# Altium PCB EASYIOTPICO.PcbDoc
Units mm, origin at the board's own origin, x right, y up, seen from the top; angles counter-clockwise.
Board outline 37.59 x 39.24 mm, 2 copper layers (Top Layer, Bottom Layer); 43 components, 31 nets, 141 pads, 61 vias.
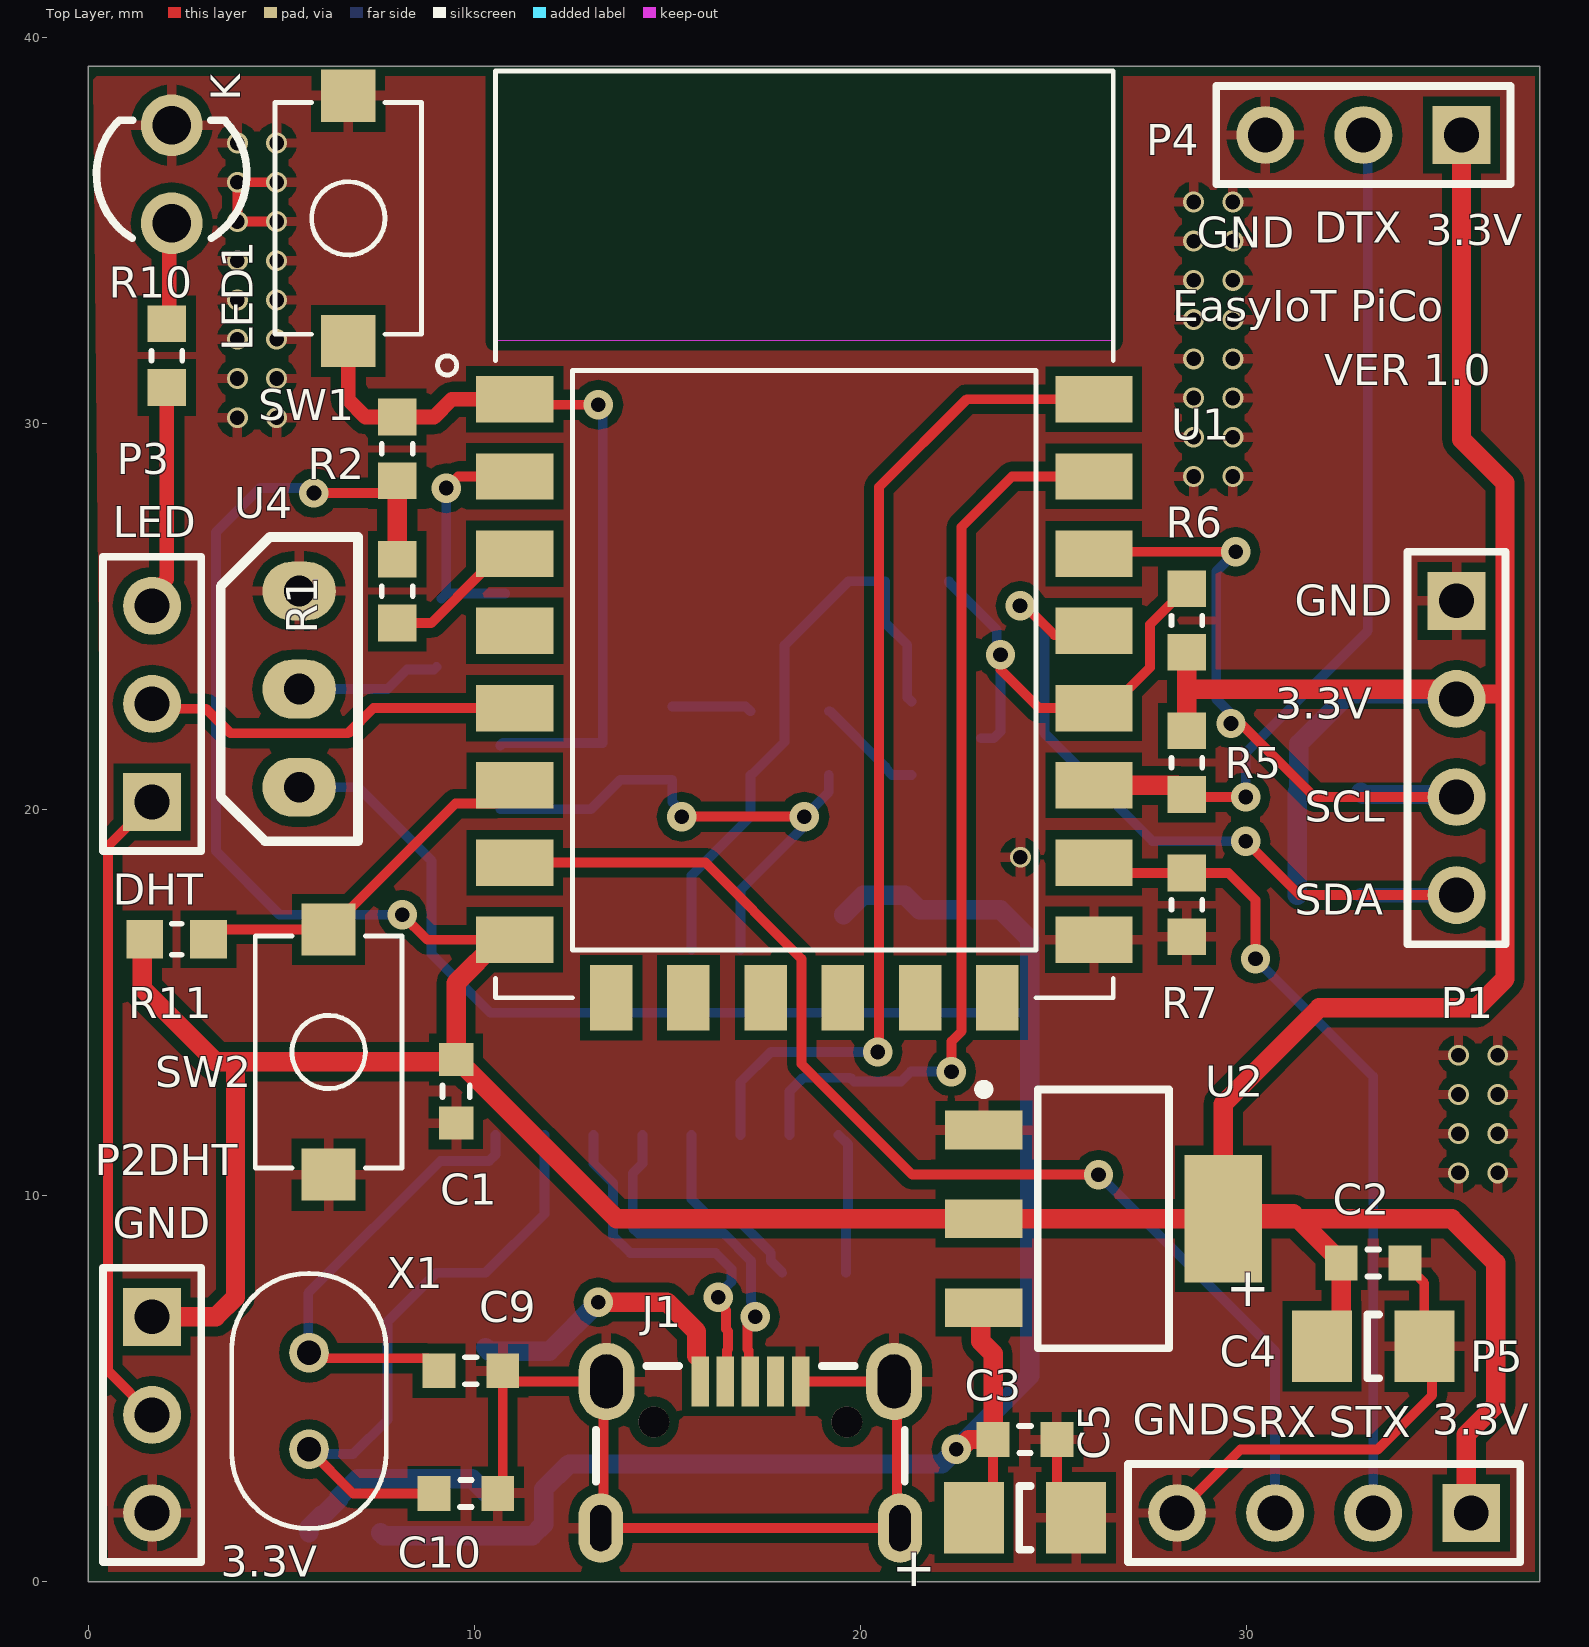
[diagram p0: Top Layer view]
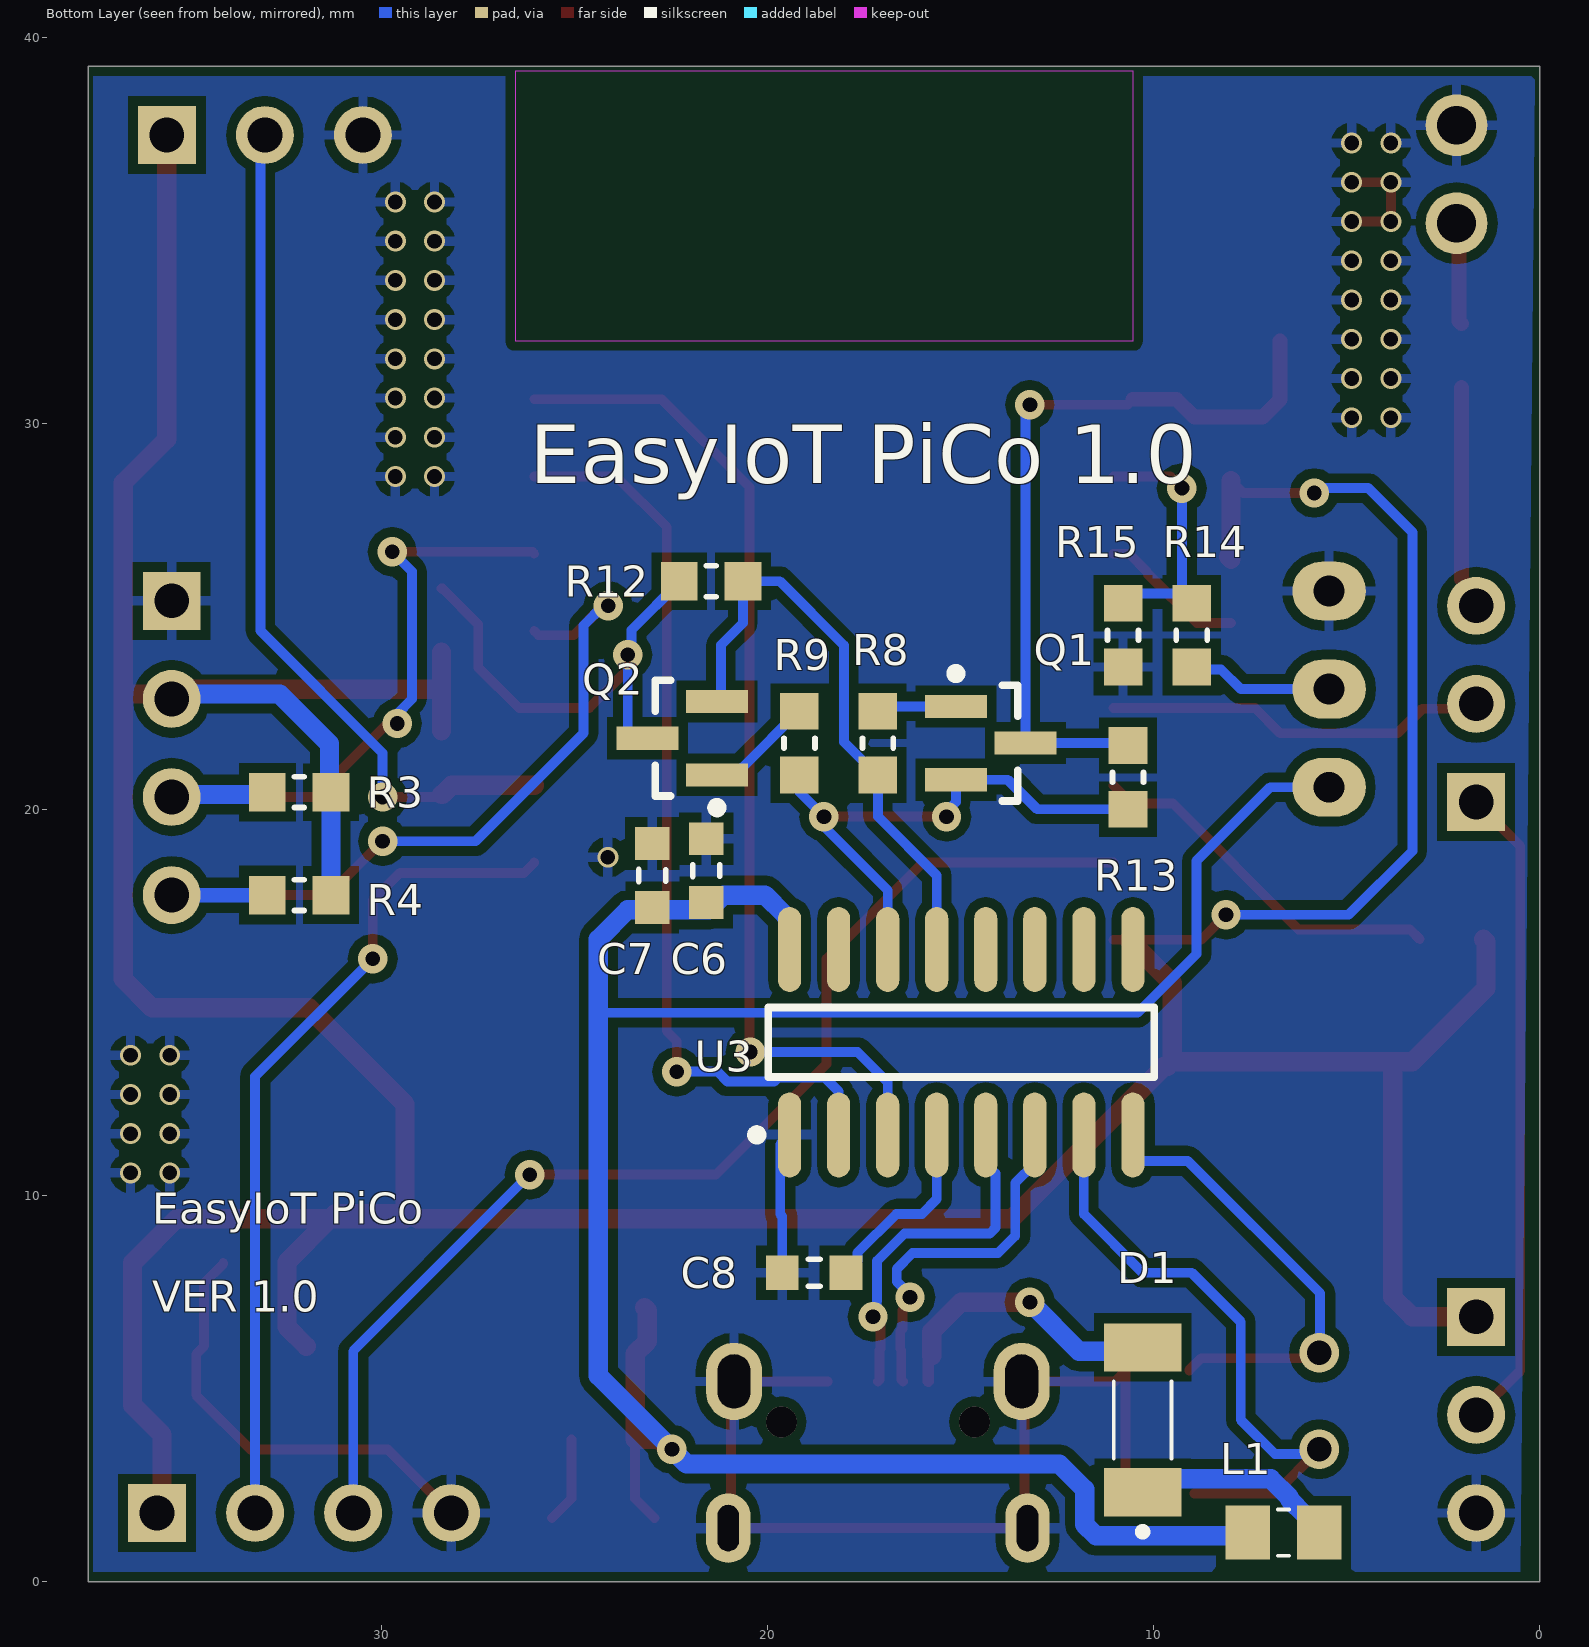
[diagram p1: Bottom Layer view, seen from below]

## Layer stack, top to bottom
Top Solder: solder mask 0.0102, Solder Resist, Dk 3.5
Top Layer: signal copper 0.0356
Dielectric 1: dielectric 0.32, FR-4, Dk 4.8
Bottom Layer: signal copper 0.0356
Bottom Solder: solder mask 0.0102, Solder Resist, Dk 3.5

## Board outline
0,0 37.592,0 37.592,39.243 0,39.243

## Design rules (kind name [scope] priority, off if disabled: settings)
Clearance [All] p1: gap=0.254 ignorepadtopadclearanceinfootprint=FALSE except(0: Arc-Hole Track-Hole SMDPad-Hole THPad-Hole Via-Hole Fill-Hole Poly-Hole Region-Hole Text-Hole; 0.2: SMDPad-SMDPad)
DiffPairsRouting [All] p1: maxlimit=0.254 minlimit=0.254 mostfreqgap=0.254 toplayer_minwidth=0.254 toplayer_maxwidth=0.381 toplayer_prefwidth=0.254 bottomlayer_minwidth=0.254 bottomlayer_maxwidth=0.381 bottomlayer_prefwidth=0.254 maxuncoupledlength=12.7
MinimumSolderMaskSliver [All] p1: minsoldermaskwidth=0.1
PolygonConnect [All] p1: connectstyle=Relief reliefconductorwidth=0.254 reliefentries=4 polygonreliefangle="90 Angle" airgapwidth=0.254
RoutingVias [All] p1: holewidth=0.381 width=0.761 viastyle="Through Hole" minholewidth=0.2 minwidth=0.5 maxholewidth=0.711 maxwidth=1.27
SilkToSolderMaskClearance [IsPad] p1: minsilkscreentomaskgap=-0.1 clearancetoexposedcopper=TRUE
SolderMaskExpansion [All] p1: expansion=0.102 istentingtop=FALSE
Width [All] p1: maxlimit=1 minlimit=0.254 preferedwidth=0.254
27 further rules are at their usual default settings.

## Classes and differential pairs
component class PROGAMMER: C6 C7 C8 C9 C10 D1 J1 L1 Q1 Q2 R8 R9 R12 R13 U3 X1
component class "POWER SUPPLY": C2 C3 C4 C5 U2
component class PERIHERALS: LED1 P1 P2DHT P3 P4 P5 R10 R11 SW2 U4
component class CONTROLLER: C1 R1 R2 R3 R4 R5 R6 R7 R14 R15 SW1 U1
differential pair D: +D_P -D_N

## Components (designator, comment, footprint, x,y, rotation, side; value= is the part's Value field where it differs from the comment)
C1 "0.1uf" CAPC0603 9.525,12.699 r270 top
C2 "0.1UF" CAPC0603 33.274,8.255 r0 top
C3 "0.1UF" CAPC0603 24.257,3.683 r0 top
C4 "10UF/10V" CAPC1206_TANTALUM 33.274,6.096 r0 top
C5 "10UF/10V" CAPC1206_TANTALUM 24.257,1.651 r0 top
C6 "0.1uf" CAPC0603 21.59,18.415 r90 bottom
C7 "0.1uf" CAPC0603 22.987,18.288 r90 bottom
C8 "0.1uf" CAPC0603 18.796,8.001 r0 bottom
C9 "22PF" CAPC0603 9.906,5.461 r180 top
C10 "22PF" CAPC0603 9.779,2.286 r180 top
D1 "SS110-A" BZT55B13GS08 10.287,4.191 r90 bottom
J1 "629105150521" 629105150521 17.145,2.286 r0 top
L1 "Inductor" CAPC0805 6.64,1.27 r0 bottom value=10mH
LED1 "LED" "Type 3mm" 2.159,36.449 r90 top
P1 "Header 4" HDR1X4 35.433,25.4 r270 top
P2DHT "Header 3" HDR1X3 1.651,6.858 r270 top (schematic designator P2)
P3 "Header 3" HDR1X3 1.651,20.193 r90 top
P4 "Header 3" HDR1X3 35.56,37.465 r180 top
P5 "Header 4" HDR1X4 35.814,1.778 r180 top
Q1 "S8050" SOT23-3 14.224,21.717 r180 bottom
Q2 "S8050" SOT23-3 22.214,21.844 r0 bottom
R1 "10K" RESC0603 8.001,25.654 r90 top value="2.55 Ohm"
R2 "10K" RESC0603 8.001,29.337 r270 top value="2.55 Ohm"
R3 "4.7K" RESC0603 32.131,20.447 r180 bottom value="2.55 Ohm"
R4 "4.7K" RESC0603 32.131,17.78 r180 bottom value="2.55 Ohm"
R5 "10K" RESC0603 28.448,21.209 r90 top value="2.55 Ohm"
R6 "10K" RESC0603 28.448,24.892 r270 top value="2.55 Ohm"
R7 "10K" RESC0603 28.448,17.526 r90 top value="2.55 Ohm"
R8 "12K" RESC0603 17.145,21.717 r270 bottom
R9 "12K" RESC0603 19.177,21.717 r270 bottom
R10 "1K" RESC0603 2.032,31.75 r270 top
R11 "10K" RESC0603 2.286,16.637 r180 top value="2.55 Ohm"
R12 "0/dnp" RESC0603 21.463,25.908 r180 bottom
R13 "0/dnp" RESC0603 10.668,20.828 r270 bottom
R14 "220K" RESC0603 9.017,24.511 r270 bottom value="2.55 Ohm"
R15 "100K" RESC0603 10.795,24.511 r90 bottom value="2.55 Ohm"
SW1 "434123025816" 434123025816 6.731,35.306 r90 top
SW2 "434123025816" 434123025816 6.223,13.716 r270 top
U1 "ESP8266-12E/ESP-12E" *XCVR_ESP8266-12E/ESP-12E 18.542,23.622 r0 top
U2 "LM1117-ADJ" SOT223 26.289,9.398 r0 top
U3 "CH340G" SOIC16_N 14.986,13.97 r90 bottom
U4 "LM35" TO92S 5.461,20.574 r90 top
X1 "ECS-120-20-46X" XTAL_ECS-120-20-46X 5.715,4.679 r270 top

## Footprints (in the part's own frame and the unit in brackets; to place one, negate y for a bottom-side part, rotate by r counter-clockwise, add the part's x,y. Pads: shape width x height; smd on the part's side, far side on the other; paste and mask are expansions set on the pad)
434123025816 [mm] "6.0*3.8mm vertical type,J-Bend SMD, height 2.5mm, black actuator, 160gf, T&R"
  rect 1.35x1.4 smd: 1(-3.175,0) 2(3.175,0)
  silkscreen extent -3,-1.9 3,1.9, body extent -3.5,-1.95 3.5,1.95, height 2.5
629105150521 [mm] "Micro USB 2.0 SMT Type B Horizontal 5 Contacts High Current"
  rect 0.45x1.3 smd: 1(-1.3,2.9) 2(-0.65,2.9) 3(0,2.9) 4(0.65,2.9) 5(1.3,2.9)
  round 0.8 hole 0.8 unplated: MH1(-2.5,1.85) MH2(2.5,1.85)
  oval 1.15x1.8 hole 0.55 slot 1.2 at 90 deg: Shell(-3.875,-0.9) Shell(3.875,-0.9)
  oval 1.45x2 hole 0.85 slot 1.4 at 90 deg: Shell(-3.725,2.9) Shell(3.725,2.9)
  silkscreen extent -4,0.3 4,3.3, body extent -4,-3.3 4,3.3, height 2.75
*XCVR_ESP8266-12E/ESP-12E [mm]
  rect 2x1.2 smd: 1(-7.5,7) 2(-7.5,5) 3(-7.5,3) 4(-7.5,1) 5(-7.5,-1) 6(-7.5,-3) 7(-7.5,-5) 8(-7.5,-7) 15(7.5,-7) 16(7.5,-5) 17(7.5,-3) 18(7.5,-1) 19(7.5,1) 20(7.5,3) 21(7.5,5) 22(7.5,7)
  rect 1.1x1.7 smd: 9(-5,-8.5) 10(-3,-8.5) 11(-1,-8.5) 12(1,-8.5) 13(3,-8.5) 14(5,-8.5)
  Keep-Out Layer region: -8.009,15.5 8,15.5 8,8.51 -8.009,8.51
  Keep-Out Layer region: -8.009,15.5 8,15.5 8,8.51 -8.009,8.51
  Keep-Out Layer region: -8.009,15.5 8,15.5 8,8.51 -8.009,8.51
  Keep-Out Layer region: -8.009,15.5 8,15.5 8,8.51 -8.009,8.51
  Keep-Out Layer region: -8.009,15.5 8,15.5 8,8.51 -8.009,8.51
  Keep-Out Layer region: -8.009,15.5 8,15.5 8,8.51 -8.009,8.51
  silkscreen extent -9.5,-8.5 8,15.5
BZT55B13GS08 [mm]
  rect 1.25x2 smd: 1(-1.875,0) 2(1.875,0)
  silkscreen extent -3,-0.75 1,0.75
CAPC0603 [mm]
  rect 0.85x0.9 smd: 1(-0.825,0) 2(0.825,0)
  silkscreen extent -0.15,-0.35 0.15,0.35, body extent -0.85,-0.45 0.85,0.45, height 0.9
CAPC0805 [mm]
  rect 1.15x1.4 smd: 1(-0.925,0) 2(0.925,0)
  silkscreen extent -0.15,-0.6 0.15,0.6, body extent -1.1,-0.67 1.1,0.67, height 0.8
CAPC1206_TANTALUM [mm] "Chip Capacitor, 2-Leads, Body 3.2x1.6mm, IPC Medium Density"
  rect 1.55x1.85 smd: 1(-1.325,0) 2(1.325,0)
  silkscreen extent -0.15,-0.82 0.15,0.82, body extent -1.7,-0.9 1.7,0.9, height 1.8
HDR1X3 [mm] "Connector; Header; 3 Position"
  rect 1.5x1.5 hole 0.9: 1(0,0)
  round 1.5 hole 0.9: 2(2.54,0) 3(5.08,0)
  silkscreen extent -1.27,-1.27 6.35,1.27
HDR1X4 [mm] "Connector; Header; 4 Position"
  rect 1.5x1.5 hole 0.9: 1(0,0)
  round 1.5 hole 0.9: 2(2.54,0) 3(5.08,0) 4(7.62,0)
  silkscreen extent -1.27,-1.27 8.89,1.27
RESC0603 [mm]
  rect 0.95x1 smd: 1(-0.825,0) 2(0.825,0)
  silkscreen extent -0.12,-0.4 0.12,0.4, body extent -0.87,-0.48 0.87,0.47, height 0.55
SOIC16_N [mm] "SOIC, 16-Leads, Body 9.9x3.9mm, Pitch 1.27mm, IPC Medium Density"
  oval 2.2x0.6 smd: 1(-2.4,4.445) 2(-2.4,3.175) 3(-2.4,1.905) 4(-2.4,0.635) 5(-2.4,-0.635) 6(-2.4,-1.905) 7(-2.4,-3.175) 8(-2.4,-4.445) 9(2.4,-4.445) 10(2.4,-3.175) 11(2.4,-1.905) 12(2.4,-0.635) 13(2.4,0.635) 14(2.4,1.905) 15(2.4,3.175) 16(2.4,4.445)
  silkscreen extent -2.52,-5 0.9,5.42, body extent -2,-5 2,5, height 1.91
SOT23-3 [mm]
  rect 1.6x0.6 smd: 1(-0.9,0.95) 2(-0.9,-0.95) 3(0.9,0)
  silkscreen extent -1.03,-1.5 0.7,1.92, body extent -0.7,-1.5 0.7,1.5, height 1.1
SOT223 [mm] "SOT223, 4-Leads, Body 6.7x7.3mm (max), Pitch 2.30mm, IPC Medium Density"
  rect 2x1 smd: 1(-3.1,2.3) 2(-3.1,0) 3(-3.1,-2.3)
  rect 2x3.3 smd: 4(3.1,0)
  silkscreen extent -3.22,-3.35 1.7,3.47, body extent -1.85,-3.35 1.85,3.35, height 1.8
TO92S [mm]
  oval 1.524x1.905 hole 0.8: 1(5.08,0) 2(2.54,0) 3(0,0)
  silkscreen extent -1.4,-1.52 6.48,2.03, body extent -1.4,-1.52 6.48,2.03, height 8.5
"Type 3mm" [mm] "THT, LED-3mm, 2pin- Body 4.15mm(max)"
  round 1.6 hole 1: 1(1.27,0) 2(-1.27,0)
  silkscreen extent -1.66,-1.95 1.4,1.95, body extent -1.93,-1.94 1.87,1.94, height 10.5
XTAL_ECS-120-20-46X [mm]
  round 1.03 hole 0.63: 1(-1.25,0) 2(1.25,0)
  silkscreen extent -3.3,-2 3.3,2

## Part data
C1 C6 C7 C8: library part CMP-2007-04765-1, Manufacturer="AVX Interconnect / Elco", Part Number=08055C104KAJ2A
C2 C3 C9 C10: library part "CAP NP"
C4 C5: library part CAP
D1: library part Diode, "Default Diode", Code_JEDEC=DO-214-AB, LatestRevisionDate=17-Jul-2002, LatestRevisionNote="Re-released for DXP Platform.", PackageDescription="DO-214-AB/SMC; 2 C-Bend Leads; Body 7.9 x 5.9 mm, inc. leads (LxW)", PackageReference=SMC, PackageVersion=Sep-1996, Published=8-Jun-2000, Publisher="Altium Limited"
J1: library part CMP-1502-03252-1, "Micro USB 2.0 Type B Receptacle WR-COM, Horizontal, SMT, with Pegs, High Current at Pin 1 & Pin 5", Contact Resistance=30mOhm, Manufacturer="Wurth Elektronik", Operating Temperature=-40to85degC, Rated Current=3A, Working Voltage=30VAC, Connector Type=MicroUSB2.0TypeB, Datasheet URL=https://katalog.we-online.de/em/datasheet/629105150521.pdf, Gender=Receptacle, Manufacturer URL=http://www.we-online.de, Mounting Technology=SMT, Orientation=Horizontal, Package Reference=629105150521, Packaging=TapeandReel, Part Number=629105150521, Publisher=WurthElektronik
P1 P5: "Header, 4-Pin", LatestRevisionDate=17-Jul-2002, LatestRevisionNote="Re-released for DXP Platform.", Publisher="Altium Limited"
P2DHT P3 P4: "Header, 3-Pin", LatestRevisionDate=17-Jul-2002, LatestRevisionNote="Re-released for DXP Platform.", Publisher="Altium Limited"
Q1 Q2: library part "NPN BEC"
R1 R2 R3 R4 R5 R6 R7 R11 R14 R15: library part CMP-1013-00215-1, "2R55 0.125W 1% 0805 (2012 Metric)  SMD", Case-EIA=0805, Case-Metric=2012, Power="0.125 W", Tolerance="1 %", Technology=SMT
R8 R9 R10 R12 R13: library part RES1, "RESISTOR"
SW1 SW2: library part CMP-1460-00004-1, "WS-TASV J-Bend SMD Tact Switch 6.0X3.8 mm", Manufacturer="Wuerth Elektronik", ComponentLink1Description="Manufacturer URL", ComponentLink1URL=http://www.we-online.com, ComponentLink2Description=Datasheet, ComponentLink2URL=http://katalog.we-online.de/em/datasheet/434123025816.pdf, NoPins=02, PackageReference=434123025816, PartNumber=434123025816
U1: "This WiFi module has a 32-bit MCU micro and clock speeds supporting 80 MHz or 160 MHz. Supports the RTOS and integrated Wi-Fi MAC/BB/RF/PA/LNA, and has an on-board antenna.", Package=None, Availability=Unavailable, MF=AI-Thinker, MP=ESP8266-12E/ESP-12E, Price=None, SnapEDA_Link=https://www.snapeda.com/parts/ESP8266-12E/ESP-12E/AI-Thinker/view-part/?ref=snap
U2: library part LM1117-3.3V_ADJ, "3.3V LDO REGULATOR"
X1: "QUARTZ CRYSTAL  T/H"
L1: Code_IEC=1005, Code_JEITA=0402, LatestRevisionDate=29-May-2009, LatestRevisionNote="IPC-7351 Footprint Added.", PackageDescription="Chip Inductor", PackageReference=0402-A, Published=8-Jun-2000, Publisher="Altium Limited"

## Via types
v1: diameter 0.54, hole 0.381, Top Layer to Bottom Layer, tented both sides, 41 vias
v2: diameter 0.761, hole 0.381, Top Layer to Bottom Layer, tented both sides, 20 vias

## Nets (pads, with @x,y where several pads share a name; then routed paths per layer and width w, separated by ;. In a path a pad name is that pad's centre, name@x,y a point inside that pad or via, vN(x,y) a via of type N, cw(c..) or ccw(c..) an arc to the next point about the centre after c; other vN are vias at no path point)
3.3V: C1.1 C2.1 C4.1 P1.2 P2DHT.1 P4.1 P5.1 R1.2 R2.2 R3.2 R4.2 R5.2 R6.2 R11.2 U1.8 U2.2 U2.4 | length 141.2
  Top Layer w0.254: v2(5.842,28.194) 7.683,28.194 R2.2 ; v2(8.128,17.272) 8.778,16.622 10.642,16.622 U1.8
  Top Layer w0.5: R11.2 1.397,16.573 1.397,15.367 3.302,13.462 3.81,13.462 ; P2DHT.1 3.302,6.858 3.81,7.366 3.81,13.462 ; R2.2 R1.2 R1.2@8.065,26.543 ; U1.8@10.642,16.622 9.525,15.505 C1.1 C1.1@9.525,13.462 ; R5.2 28.448,23.05 ; R6.2 28.448,23.05 ; U2.4@29.083,9.398 U2.2 13.676,9.398 9.725,13.349 9.638,13.349 C1.1@9.525,13.462 ; U2.4 31.331,9.398 ; C4.1 32.449,6.596 C2.1 32.449,8.28 31.331,9.398 ; P4.1 35.56,29.587 36.687,28.46 36.687,22.987 ; P5.1 35.687,1.905 35.687,3.81 36.449,4.572 36.449,8.255 35.306,9.398 31.331,9.398 ; 3.81,13.462 C1.1@9.525,13.462 ; 28.448,23.05 28.507,23.109 35.184,23.109 P1.2 35.56,22.987 36.687,22.987 ; 31.331,9.398 31.204,9.525 29.389,9.525 29.389,12.371 31.877,14.859 35.941,14.859 36.687,15.605 36.687,22.987
  Bottom Layer w0.254: v2(5.842,28.194) 5.715,28.321 4.445,28.321 3.302,27.178 3.302,18.923 4.953,17.272 v2(8.128,17.272)
  Bottom Layer w0.5: R4.2 R3.2 31.349,20.49 31.349,21.697 32.639,22.987 35.306,22.987 P1.2
5V: C3.1 C5.1 C6.1 C7.1 L1.2 U2.3 U3.16 U4.3 | length 65.6
  Top Layer w0.254: C5.1 23.432,2.151 C3.1
  Top Layer w0.5: v2(22.479,3.429) 22.55,3.429 22.804,3.683 C3.1 23.432,5.905 23.114,6.223 23.114,7.023 U2.3
  Bottom Layer w0.254: U4.3 6.985,20.574 8.889,18.67 8.889,16.258 10.416,14.732 24.257,14.732 24.384,14.859
  Bottom Layer w0.5: L1.2 7.648,1.187 11.496,1.187 11.791,1.482 11.791,2.393 12.446,3.048 22.098,3.048 v2(22.479,3.429) 24.384,5.334 24.384,14.859 24.384,16.637 23.622,17.399 22.987,17.399 21.526,17.399 21.145,17.78 20.066,17.78 U3.16@19.558,17.272
D_N: J1.2 U3.6 | length 9.4
  Top Layer w0.254: v2(16.312,7.366) 16.312,7.229 16.511,7.031 16.511,6.543 16.566,6.487 16.566,6.021 16.539,5.994 16.539,5.23 J1.2
  Bottom Layer w0.254: U3.6 13.081,10.829 13.589,10.321 13.589,8.955 14.035,8.509 16.246,8.509 16.657,8.098 16.657,7.768 16.312,7.424 v2(16.312,7.366)
D_P: J1.3 U3.5 | length 9.1
  Top Layer w0.254: v2@17.074,6.807 17.074,6.021 17.101,5.994 17.101,5.23 J1.3
  Bottom Layer w0.254: U3.5 14.351,10.829 14.097,10.575 14.097,9.166 14.246,9.017 16.457,9.017 17.165,8.309 17.165,7.26 17.175,7.25 17.175,6.955 v2(17.272,6.858)
DEBUG_TX: P4.2 R5.1 U1.17 | length 22.6
  Top Layer w0.254: R5.1 28.512,20.32 v2(29.972,20.32)
  Top Layer w0.5: U1.17 28.185,20.622 28.423,20.384 R5.1
  Bottom Layer w0.254: v2(29.972,20.32) 29.972,21.463 33.135,24.626 33.135,37.35 P4.2
DHT: P2DHT.2 P3.1 | length 16.8
  Top Layer w0.254: P2DHT.2 0.508,5.461 0.508,19.05 P3.1
DTR: Q2.3 R6.1 R12.1 U1.18 | length 12.8
  Top Layer w0.254: v2@23.368,24.003 v2(23.622,24.003) 23.622,23.622 24.622,22.622 U1.18 26.442,22.622 27.495,23.675 27.495,24.789 28.423,25.717 R6.1
  Bottom Layer w0.254: R12.1 22.288,25.883 23.525,24.646 23.525,24.1 v2(23.622,24.003) 23.622,22.017 23.449,21.844 Q2.3
GND: C1.2 C2.2 C3.2 C4.2 C5.2 C6.2 C7.2 C8.2 C9.1 C10.1 J1.5 J1.Shell LED1.1 P1.1 P2DHT.3 P4.3 P5.4 R7.1 R15.1 SW1.2 SW2.2 U1.15 U2.1 U3.1 U4.1 | length 44.5
  Top Layer w0.254: v1(4.876,35.224) v1(3.86,35.224) v1(3.86,36.24) v1(4.876,36.24) ; C10.1 10.731,2.413 C9.1 11.006,5.186 13.42,5.186 13.345,5.111 13.345,1.461 13.27,1.386 21.02,1.386 20.945,1.461 20.945,5.111 20.87,5.186 J1.5 ; C3.2 25.082,2.151 C5.2 ; P5.4 29.837,3.421 33.393,3.421 34.798,4.826 34.798,5.897 C4.2 34.599,7.73 34.099,8.23 C2.2
  Bottom Layer w0.254: U3.1 19.674,11.327 19.674,9.515 19.621,9.462 C8.2
  other v1: 35.483,10.586 36.499,10.586 35.483,11.602 36.499,11.602 35.483,12.618 36.499,12.618 35.483,13.634 36.499,13.634 24.138,18.76 28.625,28.62 29.641,28.62 28.625,29.636 29.641,29.636 3.86,30.144 4.876,30.144 28.625,30.652 29.641,30.652 3.86,31.16 4.876,31.16 28.625,31.668 29.641,31.668 3.86,32.176 4.876,32.176 28.625,32.684 29.641,32.684 3.86,33.192 4.876,33.192 28.625,33.7 29.641,33.7 3.86,34.208 4.876,34.208 28.625,34.716 29.641,34.716 28.625,35.732 29.641,35.732 3.86,37.256 4.876,37.256
I2C_SCL: P1.3 R3.1 U1.20 | length 17.7
  Top Layer w0.254: U1.20 26.09,26.67 v2(29.718,26.67) ; v2(29.591,22.225) 29.845,22.225 31.75,20.32 P1.3
  Bottom Layer w0.254: v2(29.591,22.225) 29.591,22.477 29.21,22.858 29.21,26.162 v2(29.718,26.67)
  Bottom Layer w0.5: R3.1 33.019,20.383 35.369,20.383 P1.3
I2C_SDA: P1.4 R4.1 U1.19 | length 20.8
  Top Layer w0.254: v2(24.13,25.273) 24.257,25.273 25.019,24.511 25.931,24.511 U1.19 ; v2(29.972,19.177) 31.369,17.78 P1.4
  Bottom Layer w0.254: v2(24.13,25.273) 24.257,25.273 24.765,24.765 24.765,21.971 27.559,19.177 v2(29.972,19.177)
  Bottom Layer w0.381: R4.1 P1.4
LED: P3.3 R10.2 | length 5.8
  Top Layer w0.381: P3.3 1.651,25.576 2.032,25.957 R10.2
LED1/DHT: P3.2 U1.5 | length 10
  Top Layer w0.254: P3.2 1.778,22.606 3.048,22.606 3.683,21.971 6.731,21.971 7.382,22.622 U1.5
LM_35: R14.2 U4.2 | length 3.8
  Bottom Layer w0.254: U4.2 7.747,23.114 8.255,23.622 8.953,23.622 R14.2
NetC8_1: C8.1 U3.4 | length 4.9
  Bottom Layer w0.254: U3.4 15.621,9.906 16.002,9.525 16.667,9.525 17.673,8.519 17.673,8.299 C8.1
NetD1_1: D1.1 L1.1 | length 5.4
  Bottom Layer w0.5: L1.1 5.715,1.395 6.04,1.72 6.079,1.72 6.486,2.128 6.486,2.179 6.974,2.667 9.936,2.667 D1.1
NetD1_2: D1.2 J1.1 | length 7.7
  Top Layer w0.3: 15.748,5.842 15.845,5.745 J1.1
  Top Layer w0.5: v2(13.208,7.239) 14.986,7.239 15.748,6.477 15.748,5.842
  Bottom Layer w0.5: D1.2 10.384,5.969 11.938,5.969 v2(13.208,7.239)
NetLED1_2: LED1.2 R10.1 | length 2.7
  Top Layer w0.381: R10.1 2.095,32.638 2.095,35.115 LED1.2
NetQ1_1: Q1.1 R8.1 | length 2.1
  Bottom Layer w0.254: Q1.1 17.02,22.667 R8.1
NetQ2_1: Q2.1 R9.1 | length 2.8
  Bottom Layer w0.254: R9.1 19.202,22.542 20.641,21.103 20.641,21.067 20.814,20.894 Q2.1
NetR1_1: R1.1 U1.3 | length 3.8
  Top Layer w0.254: R1.1 8.882,24.829 10.169,26.116 10.169,26.149 10.642,26.622 U1.3
NetR14_1: R14.1 R15.2 U1.2 | length 6.3
  Top Layer w0.254: v2(9.271,28.321) 9.572,28.622 U1.2
  Bottom Layer w0.254: R14.1@9.144,25.463 R14.1@9.271,25.59 ; v2(9.271,28.321) R14.1@9.271,25.59 ; R15.2@10.795,25.59 R14.1@9.271,25.59
P_DTR: Q2.2 R8.2 R12.2 U3.13 | length 15.6
  Bottom Layer w0.254: U3.13 15.621,18.288 17.145,19.812 R8.2 17.17,20.892 18.026,21.748 18.026,24.249 19.685,25.908 R12.2 20.638,24.828 21.209,24.257 21.209,22.899 Q2.2
P_RTS: Q1.2 R9.2 R13.2 U3.14 | length 14.8
  Top Layer w0.254: v2(15.367,19.812) v2(18.542,19.812)
  Bottom Layer w0.254: R13.2 13.018,20.003 13.782,20.767 Q1.2 15.124,20.192 15.367,19.949 v2(15.367,19.812) ; U3.14 16.891,17.907 18.796,19.812 v2(18.542,19.812) 19.177,20.447 R9.2
RST: Q1.3 R2.1 R13.1 SW1.1 U1.1 | length 19.9
  Top Layer w0.254: U1.1@10.541,30.622 10.683,30.48 v2(13.208,30.48)
  Top Layer w0.381: SW1.1 6.731,30.607 7.176,30.162 R2.1 8.953,30.162 9.413,30.622 U1.1@10.541,30.622
  Bottom Layer w0.254: R13.1 10.732,21.717 Q1.3 13.324,30.237 13.208,30.353 v2(13.208,30.48)
RX: U1.21 U3.2 | length 23.8
  Top Layer w0.254: v2(22.352,13.208) 22.352,13.993 22.611,14.252 22.611,27.31 23.923,28.622 U1.21
  Bottom Layer w0.254: U3.2 18.161,12.7 18.512,13.051 19.731,13.051 19.827,12.955 21.046,12.955 21.3,13.208 v2(22.352,13.208)
SWAP_RX: P5.3 U1.7 | length 30.7
  Top Layer w0.254: U1.7 15.981,18.622 18.473,16.13 18.473,13.404 21.336,10.541 v2(26.162,10.541)
  Bottom Layer w0.254: v2(26.162,10.541) 30.734,5.969 P5.3
SWAP_TX: P5.2 R7.2 U1.16 | length 21.7
  Top Layer w0.254: U1.16 26.313,18.351 R7.2 29.528,18.351 30.226,17.653 v2(30.226,16.129)
  Bottom Layer w0.254: v2(30.226,16.129) 33.274,13.081 P5.2
SWITCH: R11.1 SW2.1 U1.6 | length 9.6
  Top Layer w0.254: R11.1 3.365,16.891 SW2.1 6.248,16.891 9.506,20.149 10.569,20.149 U1.6
TX: U1.22 U3.3 | length 26.4
  Top Layer w0.254: v2(20.447,13.716) 20.473,13.742 20.473,28.347 22.748,30.622 U1.22
  Bottom Layer w0.254: U3.3 16.891,12.935 17.672,13.716 v2(20.447,13.716)
X0: C9.2 U3.8 X1.1 | length 12
  Top Layer w0.254: X1.1 5.86,5.784 8.783,5.784 9.081,5.486 C9.2
  Bottom Layer w0.254: X1.1 5.693,5.951 5.693,7.471 9.119,10.897 10.381,10.897 10.541,11.057 U3.8
X1: C10.2 U3.7 X1.2 | length 16
  Top Layer w0.254: X1.2 6.858,2.286 C10.2
  Bottom Layer w0.254: X1.2 5.842,3.302 6.858,3.302 7.747,4.191 7.747,6.731 9.016,8 10.286,8 11.811,9.525 U3.7
pads on no net: J1.4 J1.MH1 J1.MH2 U1.4 U1.9 U1.10 U1.11 U1.12 U1.13 U1.14 U3.9 U3.10 U3.11 U3.12 U3.15

## Polygon pours and split planes (outlines as drawn)
GND on Top Layer "GND_L01_P000" (solid, pour order 0): 0.128,38.989 37.465,38.989 37.465,0.254 0.511,0.254
GND on Bottom Layer "GND_L02_P001" (solid, pour order 1): 0.128,38.989 37.465,38.989 37.465,0.254 0.511,0.254

## Silkscreen, mask and mechanical layers (free items; w line width, h text height)
Top Overlay:
  text "DTX" at 31.75,34.671 h0.8
  text "3.3V" at 34.642,34.609 h0.8
  text "GND" at 28.702,34.544 h0.8
  text "EasyIoT PiCo" at 28.067,32.639 h0.8
  text "VER 1.0" at 32.004,30.988 h0.8
  text "LED" at 0.635,27.051 h0.8
  text "GND" at 31.242,25.019 h0.8
  text "3.3V" at 30.734,22.352 h0.8
  text "SCL" at 31.496,19.685 h0.8
  text "DHT" at 0.635,17.526 h0.8
  text "SDA" at 31.242,17.272 h0.8
  text "GND" at 0.635,8.89 h0.8
  text "GND" at 27.051,3.81 h0.8
  text "3.3V" at 34.798,3.81 h0.8
  text "SRX" at 29.584,3.743 h0.8
  text "STX" at 32.124,3.743 h0.8
  text "3.3V" at 3.429,0.127 h0.8
Bottom Overlay:
  text "EasyIoT PiCo 1.0" at 26.162,28.448 h1.52
  text "EasyIoT PiCo" at 35.941,9.271 h0.8
  text "VER 1.0" at 35.941,6.985 h0.8
Mechanical 1:
  the board outline again, w0.254
Mechanical 13:
  circle w0.254: c35.306,32.766 r1.448
  circle w0.254: c12.106,32.766 r1.448
  circle w0.254: c35.306,12.066 r1.448
  circle w0.254: c12.106,12.066 r1.448
  lines w0.254: 10.038,8.26 37.338,8.26 37.338,35.56 10.038,35.56 10.038,8.26

## Text inside footprints (layer, text, board x,y; h text height)
C4: Top Overlay "+" at 30.607,8.001 h1 r180
C5: Top Overlay "+" at 21.957,0.751 h1 r180
J1: Mechanical 2 "PCB Edge" at 15.845,-1.014 h0.41
LED1: Top Overlay "K" at 3.937,38.354 h0.76 r90; Mechanical 15 "K" at 3.429,38.989 h0.76 r90